# Altium PCB TMP116-pin.PcbDoc
Units mil, origin at the board's own origin, x right, y up, seen from the top; angles counter-clockwise.
Board outline 6000 x 4000 mil, 2 copper layers (Top Layer, Bottom Layer); 30 components, 5 nets, 120 pads, 66 vias.
Unrouted connection lines stored in the file: 25.
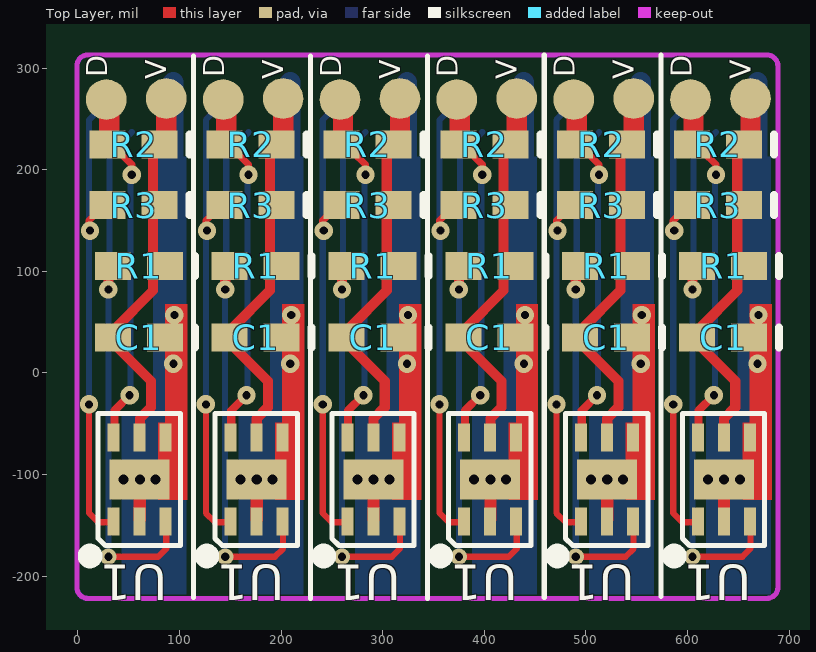
[diagram p0: Top Layer view]
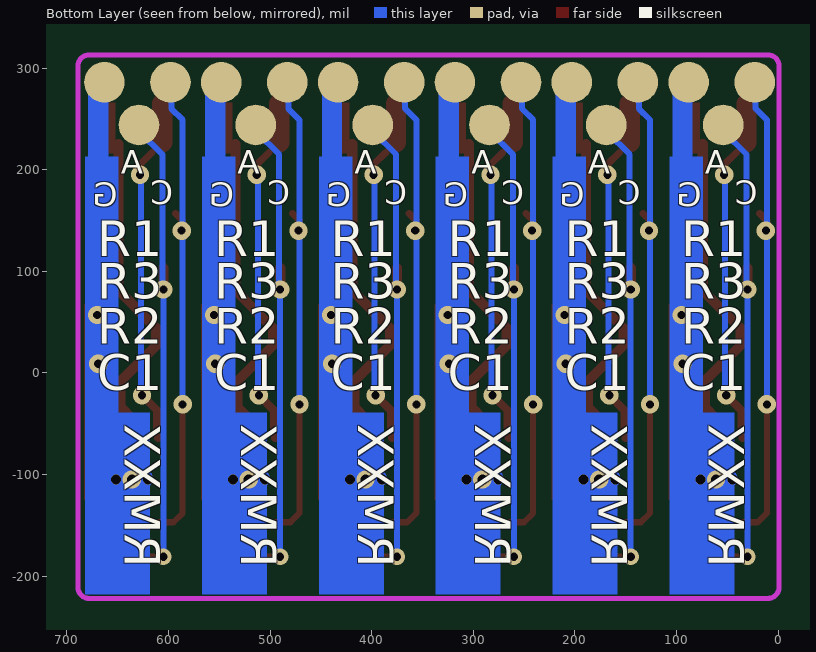
[diagram p1: Bottom Layer view, seen from below]

## Layer stack, top to bottom
Top Solder: solder mask 0.4, Solder Resist, Dk 3.5
Top Layer: signal copper 1.4
Dielectric1: dielectric 12.6, FR-4, Dk 4.8
Bottom Layer: signal copper 1.4
Bottom Solder: solder mask 0.4, Solder Resist, Dk 3.5

## Board outline
-3979,-1907 2021,-1907 2021,2093 -3979,2093

## Design rules (kind name [scope] priority, off if disabled: settings)
Clearance [All] p1 off: gap=10
FabricationTestPointUsage TestPointUsage [All] p1: valid=0 allowmultiple=FALSE
FabricationTestpoint Testpoint [All] p1: side=3 testpointundercomponent=TRUE minsize=40 maxsize=100 preferedsize=60 minholesize=0 maxholesize=40 preferedholesize=32 testpointgrid=1 allowsidetop=TRUE allowsidebottom=TRUE usegrid=TRUE gridtolerance=0.01
PolygonConnect [All] p1: connectstyle=Relief reliefconductorwidth=10 reliefentries=4 polygonreliefangle="90 Angle" airgapwidth=10
RoutingVias [All] p1: holewidth=20 width=12 viastyle="Through Hole" minholewidth=6 minwidth=8 maxholewidth=100 maxwidth=150
SolderMaskExpansion [All] p1: expansion=4
Width [All] p1: maxlimit=100 minlimit=5 preferedwidth=10 minimp=50.000000 maximp=50.000000 favimp=50.000000
28 further rules are at their usual default settings.

## Components (designator, comment, footprint, x,y, rotation, side; value= is the part's Value field where it differs from the comment)
C1 "Cap Semi" 0402 520,35 r180 top
C1 "Cap Semi" 0402 635,35 r180 top
C1 "Cap Semi" 0402 290,35 r180 top
C1 "Cap Semi" 0402 405,35 r180 top
C1 "Cap Semi" 0402 175,35 r180 top
C1 "Cap Semi" 0402 60,35 r180 top
R1 "Res1" 0402 520,105 r180 top
R1 "Res1" 0402 635,105 r180 top
R1 "Res1" 0402 290,105 r180 top
R1 "Res1" 0402 405,105 r180 top
R1 "Res1" 0402 175,105 r180 top
R1 "Res1" 0402 60,105 r180 top
R2 "Res1" 0402 515,225 r180 top
R2 "Res1" 0402 630,225 r180 top
R2 "Res1" 0402 285,225 r180 top
R2 "Res1" 0402 400,225 r180 top
R2 "Res1" 0402 170,225 r180 top
R2 "Res1" 0402 55,225 r180 top
R3 "Res1" 0402 515,165 r180 top
R3 "Res1" 0402 630,165 r180 top
R3 "Res1" 0402 285,165 r180 top
R3 "Res1" 0402 400,165 r180 top
R3 "Res1" 0402 170,165 r180 top
R3 "Res1" 0402 55,165 r180 top
U1 "Sensor" WSON 505,-105 r90 top
U1 "Sensor" WSON 620,-105 r90 top
U1 "Sensor" WSON 275,-105 r90 top
U1 "Sensor" WSON 390,-105 r90 top
U1 "Sensor" WSON 160,-105 r90 top
U1 "Sensor" WSON 45,-105 r90 top

## Footprints (in the part's own frame and the unit in brackets; to place one, negate y for a bottom-side part, rotate by r counter-clockwise, add the part's x,y. Pads: shape width x height; smd on the part's side, far side on the other; paste and mask are expansions set on the pad)
0402 [mm] "Chip Capacitor; Body 1.0 x 0.5 mm (LxW typ)"
  rect 0.9x0.7 smd: 1(-0.65,0) 2(0.65,0)
  silkscreen extent -1.4,-0.25 -1.4,0.25
WSON [mm]
  rect 0.7x0.3 smd: 1(-1.05,0.25) 2(-1.05,-0.4) 3(-1.05,-1.05) 4(1.05,-1.05) 5(1.05,-0.4) 6(1.05,0.25)
  rect 1x1.5 smd: 2(0,-0.4)
  silkscreen extent -2.02,-1.42 1.65,0.95

## Part data
C1 C1 C1 C1 C1 C1: "Capacitor (Semiconductor SIM Model)"
R1 R1 R1 R1 R1 R1 R2 R2 R2 R2 R2 R2 R3 R3 R3 R3 R3 R3: "Resistor"
U1 U1 U1 U1 U1 U1: library part TMP116

## Free pads (board coordinates)
  round 40 smd: 2(28,269) 2(87,270) 2(143,269) 2(202,270) 2(258,269) 2(317,270) 2(373,269) 2(432,270) 2(488,269) 2(547,270) 2(603,269) 2(662,270)
  round 40 smd far side: 3(23,286) 3(54,244) 3(88,286) 3(138,286) 3(169,244) 3(203,286) 3(253,286) 3(284,244) 3(318,286) 3(368,286) 3(399,244) 3(433,286) 3(483,286) 3(514,244) 3(548,286) 3(598,286) 3(629,244) 3(663,286)

## Via types
v1: diameter 18, hole 8, Top Layer to Bottom Layer, 42 vias
v2: diameter 9.84, hole 9.84, Top Layer to Bottom Layer, 12 vias
v3: diameter 18, hole 10, Top Layer to Bottom Layer, 6 vias
v4: diameter 16, hole 8, Top Layer to Bottom Layer, 6 vias

## Nets (pads, with @x,y where several pads share a name; then routed paths per layer and width w, separated by ;. In a path a pad name is that pad's centre, name@x,y a point inside that pad or via, vN(x,y) a via of type N, cw(c..) or ccw(c..) an arc to the next point about the centre after c; other vN are vias at no path point)
ALT: pad.3@54,244 pad.3@169,244 pad.3@284,244 pad.3@399,244 pad.3@514,244 pad.3@629,244 R1.2 U1.3 | length 3222.5
  Top Layer w6: v4@29.34,-181 79,-181 87,-173 U1.3@87,-149 ; v4@144.34,-181 194,-181 202,-173 U1.3@202,-149 ; v4@259.34,-181 309,-181 317,-173 U1.3@317,-149 ; v4@374.34,-181 424,-181 432,-173 U1.3@432,-149 ; v4@489.34,-181 539,-181 547,-173 U1.3@547,-149 ; v4@604.34,-181 654,-181 662,-173 U1.3@662,-149
  Top Layer w8: U1.3@86,-146 U1.3@86.02,-145 ; U1.3@201,-146 U1.3@201.02,-145 ; U1.3@316,-146 U1.3@316.02,-145 ; U1.3@431,-146 U1.3@431.02,-145 ; U1.3@546,-146 U1.3@546.02,-145 ; U1.3@661,-146 U1.3@661.02,-145
  Top Layer w10: v1(30,82) R1.2@30,103 ; v1(145,82) R1.2@145,103 ; v1(260,82) R1.2@260,103 ; v1(375,82) R1.2@375,103 ; v1(490,82) R1.2@490,103 ; v1(605,82) R1.2@605,103
  Bottom Layer w6: v4(30,-181) v1@30,84 ; v1@31,81 31,215 pad.3@53,237 ; v4(145,-181) v1@145,84 ; v1@146,81 146,215 pad.3@168,237 ; v4(260,-181) v1@260,84 ; v1@261,81 261,215 pad.3@283,237 ; v4(375,-181) v1@375,84 ; v1@376,81 376,215 pad.3@398,237 ; v4(490,-181) v1@490,84 ; v1@491,81 491,215 pad.3@513,237 ; v4(605,-181) v1@605,84 ; v1@606,81 606,215 pad.3@628,237
GND: C1.1 pad.3@88,286 pad.3@203,286 pad.3@318,286 pad.3@433,286 pad.3@548,286 pad.3@663,286 U1.2 U1.4 | length 2727.4
  Top Layer w6: U1.2@61,-147 U1.2@60.99,-146.34 ; U1.2@176,-147 U1.2@175.99,-146.34 ; U1.2@291,-147 U1.2@290.99,-146.34 ; U1.2@406,-147 U1.2@405.99,-146.34 ; U1.2@521,-147 U1.2@520.99,-146.34 ; U1.2@636,-147 U1.2@635.99,-146.34
  Top Layer w12: U1.2@61,-144 U1.2@61,-120 ; U1.2@176,-144 U1.2@176,-120 ; U1.2@291,-144 U1.2@291,-120 ; U1.2@406,-144 U1.2@406,-120 ; U1.2@521,-144 U1.2@521,-120 ; U1.2@636,-144 U1.2@636,-120
  Bottom Layer w20: 50,-104 87,-104 94,-97 pad.3@94,286 ; 165,-104 202,-104 209,-97 pad.3@209,286 ; 280,-104 317,-104 324,-97 pad.3@324,286 ; 395,-104 432,-104 439,-97 pad.3@439,286 ; 510,-104 547,-104 554,-97 pad.3@554,286 ; 625,-104 662,-104 669,-97 pad.3@669,286
  other v1: 94,9 209,9 324,9 439,9 554,9 669,9 95,57 210,57 325,57 440,57 555,57 670,57
  other v2: 45,-105 76.5,-105 160,-105 191.5,-105 275,-105 306.5,-105 390,-105 421.5,-105 505,-105 536.5,-105 620,-105 651.5,-105
  other v3: 61,-105 176,-105 291,-105 406,-105 521,-105 636,-105
SCL: pad.3@23,286 pad.3@138,286 pad.3@253,286 pad.3@368,286 pad.3@483,286 pad.3@598,286 R3.2 U1.1 | length 2835.6
  Top Layer w6: v1@10,-31 11,-32 11,-138 20,-147 U1.1@35,-147 ; v1@125,-31 126,-32 126,-138 135,-147 U1.1@150,-147 ; v1@240,-31 241,-32 241,-138 250,-147 U1.1@265,-147 ; v1@355,-31 356,-32 356,-138 365,-147 U1.1@380,-147 ; v1@470,-31 471,-32 471,-138 480,-147 U1.1@495,-147 ; v1@585,-31 586,-32 586,-138 595,-147 U1.1@610,-147
  Top Layer w7: v1@11,141 11,150 R3.2@18,157 ; v1@126,141 126,150 R3.2@133,157 ; v1@241,141 241,150 R3.2@248,157 ; v1@356,141 356,150 R3.2@363,157 ; v1@471,141 471,150 R3.2@478,157 ; v1@586,141 586,150 R3.2@593,157
  Bottom Layer w6: v1(11,-31) 11,249 22,260 pad.3@22,283 ; v1(126,-31) 126,249 137,260 pad.3@137,283 ; v1(241,-31) 241,249 252,260 pad.3@252,283 ; v1(356,-31) 356,249 367,260 pad.3@367,283 ; v1(471,-31) 471,249 482,260 pad.3@482,283 ; v1(586,-31) 586,249 597,260 pad.3@597,283
  other v1: 12,140 127,140 242,140 357,140 472,140 587,140
SDA: pad.2@28,269 pad.2@143,269 pad.2@258,269 pad.2@373,269 pad.2@488,269 pad.2@603,269 R2.2 U1.6 | length 1929.1
  Top Layer w7: R2.2@41,217 53,205 v1(53,195) ; R2.2@156,217 168,205 v1(168,195) ; R2.2@271,217 283,205 v1(283,195) ; R2.2@386,217 398,205 v1(398,195) ; R2.2@501,217 513,205 v1(513,195) ; R2.2@616,217 628,205 v1(628,195)
  Top Layer w8: U1.6@35,-64 U1.6@35,-63.66 ; U1.6@36,-54 36,-37 v1(51,-22) ; U1.6@150,-64 U1.6@150,-63.66 ; U1.6@151,-54 151,-37 v1(166,-22) ; U1.6@265,-64 U1.6@265,-63.66 ; U1.6@266,-54 266,-37 v1(281,-22) ; U1.6@380,-64 U1.6@380,-63.66 ; U1.6@381,-54 381,-37 v1(396,-22) ; U1.6@495,-64 U1.6@495,-63.66 ; U1.6@496,-54 496,-37 v1(511,-22) ; U1.6@610,-64 U1.6@610,-63.66 ; U1.6@611,-54 611,-37 v1(626,-22)
  Top Layer w20: R2.2@31,227 pad.2@31,265 ; R2.2@146,227 pad.2@146,265 ; R2.2@261,227 pad.2@261,265 ; R2.2@376,227 pad.2@376,265 ; R2.2@491,227 pad.2@491,265 ; R2.2@606,227 pad.2@606,265
  Bottom Layer w6: v1@52,-22 v1@52,193 ; v1@53,194 v1@53,197 ; v1@167,-22 v1@167,193 ; v1@168,194 v1@168,197 ; v1@282,-22 v1@282,193 ; v1@283,194 v1@283,197 ; v1@397,-22 v1@397,193 ; v1@398,194 v1@398,197 ; v1@512,-22 v1@512,193 ; v1@513,194 v1@513,197 ; v1@627,-22 v1@627,193 ; v1@628,194 v1@628,197
VCC: C1.2 pad.2@87,270 pad.2@202,270 pad.2@317,270 pad.2@432,270 pad.2@547,270 pad.2@662,270 R1.1 R2.1 R3.1 U1.5 | length 1958.3
  Top Layer w10: U1.5@61,-67 61,-45 72,-34 72,-8 37,27 37,44 74,81 R2.1@74,225 ; U1.5@176,-67 176,-45 187,-34 187,-8 152,27 152,44 189,81 R2.1@189,225 ; U1.5@291,-67 291,-45 302,-34 302,-8 267,27 267,44 304,81 R2.1@304,225 ; U1.5@406,-67 406,-45 417,-34 417,-8 382,27 382,44 419,81 R2.1@419,225 ; U1.5@521,-67 521,-45 532,-34 532,-8 497,27 497,44 534,81 R2.1@534,225 ; U1.5@636,-67 636,-45 647,-34 647,-8 612,27 612,44 649,81 R2.1@649,225

## Keep-outs
Keep-Out Layer:
  lines w5: 102,-222 218,-222 ; 103,-222 10,-222 cw(c10,-211) -1,-211 -1,302 cw(c10,302) 10,313 126,313 ; 125,313 240,313 358,313 ; 215,-222 333,-222 448,-222 ; 355,313 473,313 ; 446,-222 563,-222 678,-222 ccw(c678,-211) 689,-211 689,302 ccw(c678,302) 678,313 ; 470,313 564,313 ; 563,313 679,313

## Other copper
Top Layer:
  rectangle net GND: 546,-62 568,68
  rectangle net GND: 539,-125 568,-49
  rectangle net VCC: 537,216 557,266
  rectangle net VCC: 652,216 672,266
  rectangle net GND: 654,-125 683,-49
  rectangle net GND: 661,-62 683,68
  rectangle net GND: 316,-62 338,68
  rectangle net GND: 309,-125 338,-49
  rectangle net VCC: 307,216 327,266
  rectangle net VCC: 422,216 442,266
  rectangle net GND: 424,-125 453,-49
  rectangle net GND: 431,-62 453,68
  rectangle net GND: 201,-62 223,68
  rectangle net GND: 194,-125 223,-49
  rectangle net VCC: 192,216 212,266
  rectangle net VCC: 77,216 97,266
  rectangle net GND: 79,-125 108,-49
  rectangle net GND: 86,-62 108,68
Bottom Layer:
  rectangle net GND: 534,-65 567,213
  rectangle net GND: 503,-218 567,-39
  rectangle net GND: 618,-218 682,-39
  rectangle net GND: 649,-65 682,213
  rectangle net GND: 304,-65 337,213
  rectangle net GND: 273,-218 337,-39
  rectangle net GND: 388,-218 452,-39
  rectangle net GND: 419,-65 452,213
  rectangle net GND: 189,-65 222,213
  rectangle net GND: 158,-218 222,-39
  rectangle net GND: 43,-218 107,-39
  rectangle net GND: 74,-65 107,213

## Silkscreen, mask and mechanical layers (free items; w line width, h text height)
Top Overlay:
  lines w5: 114,-221 114,312 ; 229,-222 229,312 ; 344,-222 344,312 ; 459,-221 459,313 ; 574,-220 574,313
  text "D" at 36,291 h35 r90
  text "D" at 151,291 h35 r90
  text "D" at 266,291 h35 r90
  text "D" at 381,291 h35 r90
  text "D" at 496,291 h35 r90
  text "D" at 611,291 h35 r90
  text "V" at 94,289 h35 r90
  text "V" at 209,289 h35 r90
  text "V" at 324,289 h35 r90
  text "V" at 439,289 h35 r90
  text "V" at 554,289 h35 r90
  text "V" at 669,289 h35 r90
Bottom Overlay:
  text "A" at 50,188 h40
  text "A" at 165,188 h40
  text "A" at 280,188 h40
  text "A" at 395,188 h40
  text "A" at 510,188 h40
  text "A" at 625,188 h40
  text "C" at 20,158 h40
  text "C" at 135,158 h40
  text "C" at 250,158 h40
  text "C" at 365,158 h40
  text "C" at 480,158 h40
  text "C" at 595,158 h40
  text "G" at 75,156 h40
  text "G" at 190,156 h40
  text "G" at 305,156 h40
  text "G" at 420,156 h40
  text "G" at 535,156 h40
  text "G" at 650,156 h40
  text "RMXX" at 80,-192 h60 r90
  text "RMXX" at 195,-192 h60 r90
  text "RMXX" at 310,-192 h60 r90
  text "RMXX" at 425,-192 h60 r90
  text "RMXX" at 540,-192 h60 r90
  text "RMXX" at 655,-192 h60 r90